# Altium PCB NG6013.PcbDoc
Units mm, origin at the board's own origin, x right, y up, seen from the top; angles counter-clockwise.
Board outline 18 x 24.5 mm, 2 copper layers (Layer 1, Layer 2), stack 1.57 mm thick; 16 components, 15 nets, 73 pads, 34 vias.
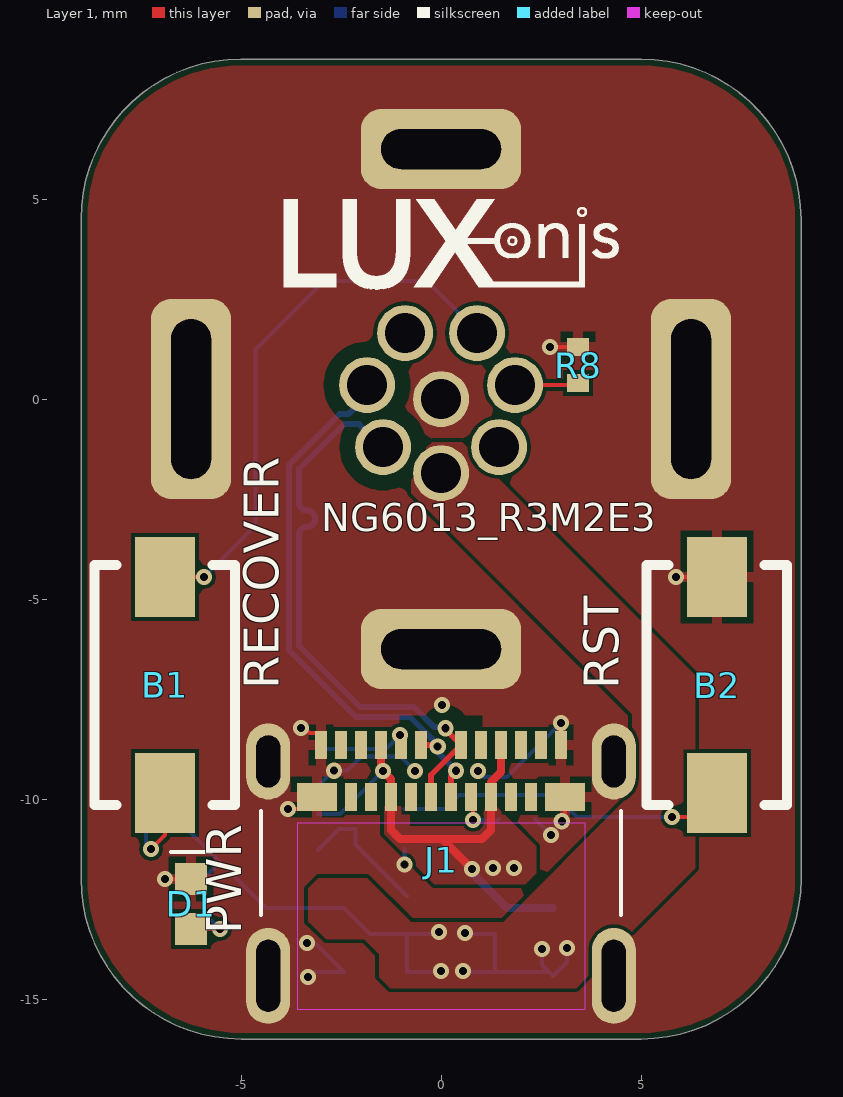
[diagram p0: Layer 1 view]
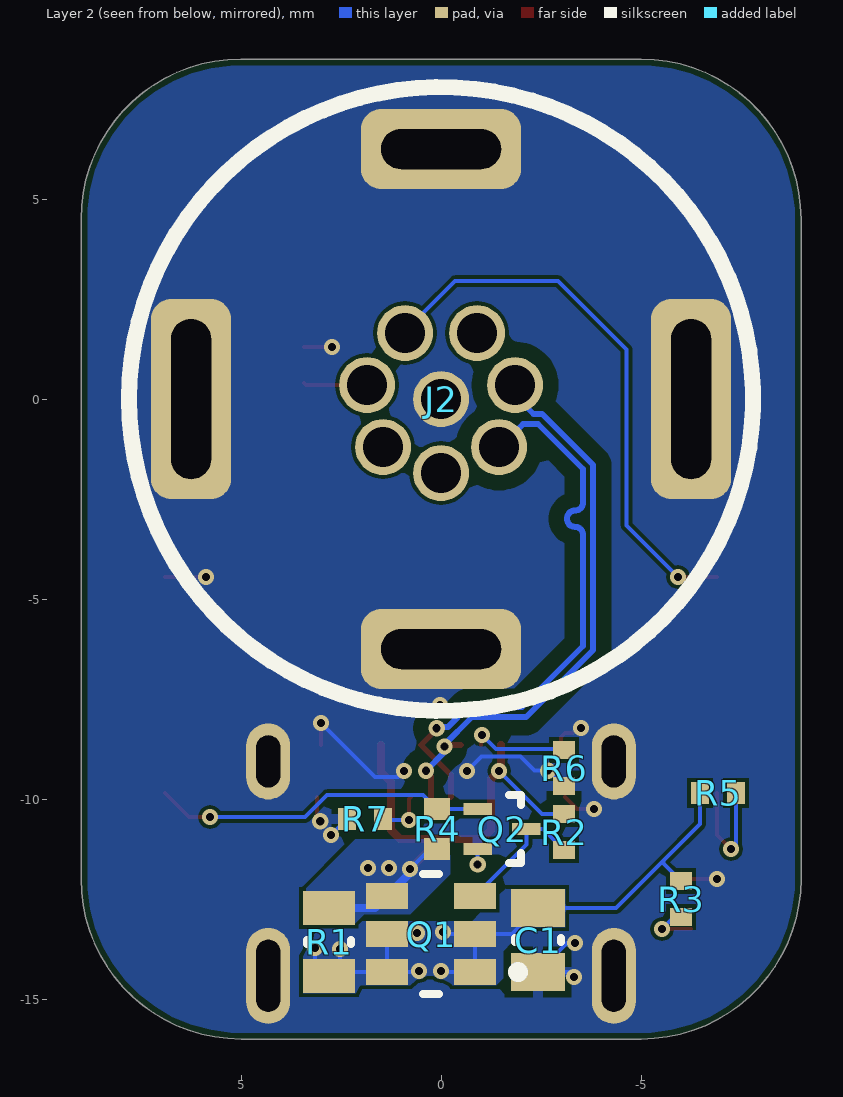
[diagram p1: Layer 2 view, seen from below]
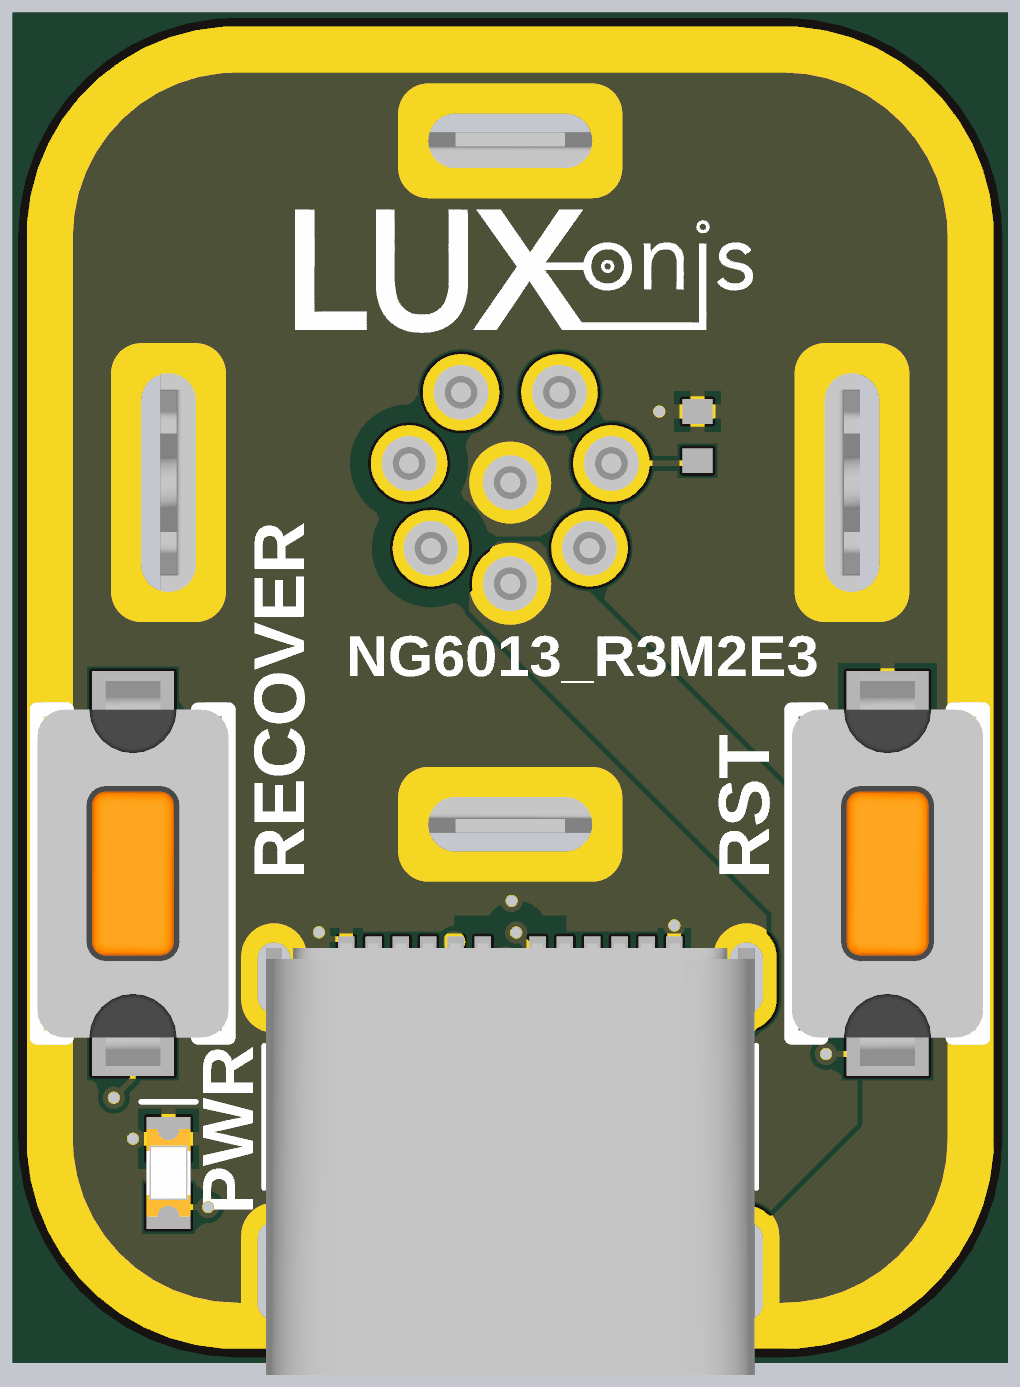
[diagram p2: 3D render of the assembled board from above, using the file's embedded part models]

## Layer stack, top to bottom
Top Solder Mask: solder mask 0.01, Solder Resist, Dk 3.5
Layer 1: signal copper 0.035
Dielectric 2: core 1.5, Core-038, Dk 4.3
Layer 2: signal copper 0.035
Bottom Solder Mask: solder mask 0.01, Solder Resist, Dk 3.5

## Board outline
-9,-12 ccw(c-5,-12) -5,-16 5,-16 ccw(c5,-12) 9,-12 9,4.5 ccw(c5,4.5) 5,8.5 -5,8.5 ccw(c-5,4.5) -9,4.5

## Design rules (kind name [scope] priority, off if disabled: settings)
AcuteAngle [All] p1: minimum=1.50000000000000E+0001 checktracksonly=TRUE
AssemblyTestPointUsage [All] p1: valid=2
BoardOutlineClearance [not InNet('GND')] p1: gap=0.254 ignorepadtopadclearanceinfootprint=FALSE except(0: Text-OutlineEdge Text-CavityEdge Text-CutoutEdge Text-SplitBarrior Text-SplitContinuation)
BoardOutlineClearance BoardOutlineClearance_GND [All] p2: gap=0.15 ignorepadtopadclearanceinfootprint=FALSE
Clearance diff_pair_gnd [InPolygon vs InAnyDifferentialPair] p1: gap=0.381 ignorepadtopadclearanceinfootprint=FALSE
Clearance [All] p2: gap=0.089 ignorepadtopadclearanceinfootprint=FALSE
Clearance Clearance_default [All] p3: gap=0.102 ignorepadtopadclearanceinfootprint=FALSE
ComponentClearance "BGA Decoupling Clearance" [IsComponent AND OnBottomLayer AND WithinRoom('BGA Decoupling') vs IsComponent AND OnBottomLayer AND WithinRoom('BGA Decoupling')] p1: gap=0 collisioncheckmode=3 verticalgap=0 showdistances=FALSE
ComponentClearance [All] p2: gap=0 collisioncheckmode=3 verticalgap=0 showdistances=TRUE
ComponentOrientations [All] p1: allowedrotations=32
DiffPairsRouting USB [InDifferentialPairClass('USB3')] p1: maxlimit=0.1 minlimit=0.1 mostfreqgap=0.1 toplayer_minwidth=0.15 toplayer_maxwidth=0.15 toplayer_prefwidth=0.15 bottomlayer_minwidth=0.15 bottomlayer_maxwidth=0.15 bottomlayer_prefwidth=0.15 impedanceprofiledriven=TRUE impedanceprofileid={297CAB22-67D0-4EEE-AAEA-9CF56FDF7430} impedanceprofilevalue=90.000000 maxuncoupledlength=12.7
FabricationTestPointUsage [All] p1: valid=2 allowmultiple=FALSE
HoleSize [All] p1: absolutevalues=TRUE maxlimit=25.4 minlimit=0.102 maxpercent=80.000 minpercent=20.000
HoleToHoleClearance [All] p1: gap=0.076 allowstackedmicrovias=TRUE
MatchedLengths "Schematic Matched Net Lengths" [InNetClass('USB')] p1: tolerance=25.4 checknetsindiffpair=TRUE checkdiffpairvsdiffpair=FALSE checkxsignals=FALSE checkothers=FALSE usedelayunits=TRUE delaytolerance=1.000000
MatchedLengths DifferentialPairs [All] p2: tolerance=0.127 checknetsindiffpair=TRUE checkdiffpairvsdiffpair=FALSE checkxsignals=FALSE checkothers=FALSE usedelayunits=TRUE delaytolerance=1.000000
MinimumAnnularRing [All] p1: minimumring=0.076
MinimumSolderMaskSliver [All] p1: minsoldermaskwidth=0.01
NetAntennae [All] p1: netantennaetolerance=0.025
PlaneConnect [All] p1: pad.planeconnectstyle=Relief pad.reliefexpansion=0.508 pad.reliefentries=4 pad.reliefconductorwidth=0.254 pad.reliefairgap=0.254 via.planeconnectstyle=Direct via.reliefexpansion=0.508 via.reliefentries=4 via.reliefconductorwidth=0.254 via.reliefairgap=0.254
PolygonConnect Outer_Layer_PWR [InNetClass('Power_trace')] p1: connectstyle=Direct reliefconductorwidth=0.254 reliefentries=4 polygonreliefangle="90 Angle" airgapwidth=0.254
PolygonConnect GenericPoly [All] p2: thpad.connectstyle=Direct thpad.reliefconductorwidth=0.254 thpad.reliefentries=4 thpad.polygonreliefangle="90 Angle" thpad.airgapwidth=0.254 smdpad.connectstyle=Relief smdpad.reliefconductorwidth=0.254 smdpad.reliefentries=4 smdpad.polygonreliefangle="90 Angle" smdpad.airgapwidth=0.154 via.connectstyle=Direct via.reliefconductorwidth=0.254 via.reliefentries=4 via.polygonreliefangle="90 Angle" via.airgapwidth=0.254
RoutingPriority [InNet('No Net')] p1: routingpriority=0
RoutingVias [All] p1: holewidth=0.203 width=0.406 viastyle="Through Hole" minholewidth=0.203 minwidth=0.406 maxholewidth=0.203 maxwidth=0.406
SMDToCorner [All] p1: distance=0
SMDToPlane [All] p1: distance=0
SilkToSilkClearance [All] p1: silktosilkclearance=-0.254
SilkToSolderMaskClearance [IsPad] p1: minsilkscreentomaskgap=-5 clearancetoexposedcopper=TRUE
SolderMaskExpansion SolderMaskExpansion_via [isvia] p1: expansion=0.102 istentingtop=TRUE
SolderMaskExpansion [All] p2: expansion=0.051 istentingtop=FALSE
UnRoutedNet [All] p1: checkbadconnections=TRUE
ViasUnderSMD [All] p1: allowed=TRUE
Width Width_default [Not IsDifferentialPair] p1: maxlimit=1.27 minlimit=0.102 preferedwidth=0.102
17 further rules are at their usual default settings.

## Classes and differential pairs
net class Power_trace: VBUS_USB VBUSOUT
net class USB: USB_D_N USB_D_P
differential pair class USB3: RXB RXC TXB TXC USB_D
differential pair USB_D: +USB_D_P -USB_D_N

## Components (designator, comment, footprint, x,y, rotation, side; value= is the part's Value field where it differs from the comment)
B1 "Off-Mom, 50mA" DTSM-32N-V -6.9,-7.15 r270 top locked
B2 "Off-Mom, 50mA" DTSM-32N-V 6.9,-7.15 r270 top
C1 "47UF 0805" CAPC0805(2012)145_L -2.425,-13.525 r90 bottom
D1 "GREEN 0603" SML_D1xx8W -6.25,-12.625 r270 top
J1 "USB3.1 TYPEC 24P SMD RA" 105450-0101 0,-9.3 r0 top locked
J2 "08-3101-08PB" 1424236 0,0 r180 bottom locked
Q1 "IRLTS2242TRPBF" TSOP-6-MFG 0.25,-13.375 r0 bottom
Q2 "RE1C002UNTCL" RE1C002UNTCL -1.525,-10.75 r270 bottom
R1 "0R 0805" RESC0805(2012)_L 2.8,-13.575 r270 bottom
R2 "100K 0402" RESC0402(1005)_L -3.075,-10.825 r90 bottom
R3 "1K 0402" RESC0402(1005)_L -6,-12.5 r90 bottom
R4 "4.7K 0402" RESC0402(1005)_N 0.1,-10.75 r270 bottom
R5 "10K 0402" RESC0402(1005)_L -6.925,-9.85 r0 bottom
R6 "5.11K 0402" RESC0402(1005)_L -3.075,-9.225 r90 bottom
R7 "5.11K 0402" RESC0402(1005)_L 1.9,-10.5 r180 bottom
R8 "0R 0402" RESC0402(1005)_L 3.425,0.85 r270 top

## Footprints (in the part's own frame and the unit in brackets; to place one, negate y for a bottom-side part, rotate by r counter-clockwise, add the part's x,y. Pads: shape width x height; smd on the part's side, far side on the other; paste and mask are expansions set on the pad)
105450-0101 [mm] "USB3.1 Type-C Molex SMT, RA, TH"
  rect 0.3x0.7 smd mask+0.05: A1(-3,0.65) A2(-2.5,0.65) A3(-2,0.65) A4(-1.5,0.65) A5(-1,0.65) A6(-0.5,0.65) A7(0.5,0.65) A8(1,0.65) A9(1.5,0.65) A10(2,0.65) A11(2.5,0.65) A12(3,0.65) B2(2.25,-0.65) B3(1.75,-0.65) B4(1.25,-0.65) B5(0.75,-0.65) B6(0.25,-0.65) B7(-0.25,-0.65) B8(-0.75,-0.65) B9(-1.25,-0.65) B10(-1.75,-0.65) B11(-2.25,-0.65)
  rect 1x0.7 smd mask+0.05: B1(3.1,-0.65) B12(-3.1,-0.65)
  oval 1.1x1.9 hole 0.6 slot 1.3 at 90 deg mask+0.05: SH1(-4.32,0.24) SH4(4.32,0.24)
  oval 1.1x2.4 hole 0.6 slot 1.8 at 90 deg mask+0.05: SH2(-4.32,-5.12) SH3(4.32,-5.12)
  Layer 1 keep-out region: -3.6,-5.95 3.6,-5.95 3.6,-1.3 -3.6,-1.3
  silkscreen extent -4.5,-3.6 4.5,-1, body extent -4.47,-7.02 4.47,0.88, height 3.2
1424236 [mm]
  round 1.4 hole 1 paste-10 mask+0.05: 1(-0.9,1.65) 2(0.9,1.65) 3(1.85,0.35) 4(1.45,-1.2) 5(0,-1.85) 6(-1.45,-1.2) 7(-1.85,0.35) 8(0,0)
  rrect50% 4x2 hole 1 slot 3 at 0 deg paste-10 mask+0.05: 9(0,-6.25) 11(0,6.25)
  rrect50% 2x5 hole 1 slot 4 at 90 deg paste-10 mask+0.05: 10(6.25,0) 12(-6.25,0)
  silkscreen extent -7.8,-7.8 7.8,7.8, body extent -6.4,-6.4 6.4,6.4, height 17.2
CAPC0805(2012)145_L [mm] "Chip Capacitor, Body 2.0x1.2mm, Height 1.45mm, IPC High Density"
  rect 0.95x1.35 smd: 1(-0.8,0) 2(0.8,0)
  silkscreen extent -0.05,-0.58 0.05,0.58, body extent -1.1,-0.73 1.1,0.72, height 1.45
DTSM-32N-V [mm] "tactile button 160gf"
  rect 2x1.5 smd: 1(-2.7,0) 2(2.7,0)
  silkscreen extent -3.01,-1.76 3,1.75, body extent -3.65,-1.75 3.65,1.75, height 5
RE1C002UNTCL [mm] "ROHM SOT-416FL"
  rect 0.3x0.71 smd: 1(-0.5,-0.61) 2(0.5,-0.61) 3(0,0.61)
  silkscreen extent -0.85,0.17 0.85,0.48, body extent -0.8,-0.8 0.8,0.8, height 0.75
RESC0402(1005)_L [mm] "Chip Resistor, Body 1.0x0.5mm, IPC High Density"
  rect 0.45x0.55 smd: 1(-0.45,0) 2(0.45,0)
  body extent -0.52,-0.27 0.53,0.28, height 0.4
RESC0402(1005)_N [mm] "Chip Resistor, Body 1.0x0.5mm, IPC Medium Density"
  rect 0.55x0.65 smd: 1(-0.5,0) 2(0.5,0)
  body extent -0.52,-0.27 0.53,0.28, height 0.4
RESC0805(2012)_L [mm] "Chip Resistor, Body 2.0x1.3mm, IPC High Density"
  rect 0.85x1.3 smd: 1(-0.85,0) 2(0.85,0)
  silkscreen extent -0.05,-0.55 0.05,0.55, body extent -1.1,-0.67 1.1,0.68, height 0.7
SML_D1xx8W [mm] "Rohm LED SML_D1 series - Chip Diode, 2-Leads, Body 1.60x0.80mm, IPC High Density"
  rect 0.8x0.8 smd: 1(-0.625,0) 2(0.625,0)
  silkscreen extent -1.3,-0.5 -1.3,0.5, body extent -0.8,-0.4 0.8,0.4, height 0.6
TSOP-6-MFG [mm]
  rect 1.06x0.65 smd: 1(-1.1,0.95) 2(-1.1,0) 3(-1.1,-0.95) 4(1.1,-0.95) 5(1.1,0) 6(1.1,0.95)
  silkscreen extent -2.3,-1.5 0.2,1.5, body extent -1.4,-1.45 1.4,1.45, height 1.45

## Part data
B1 B2: library part DTSM-32N-V, "SWITCH TACTILE SMT 3.5mm * 6mm , brown 160gf", Manufacturer 1=Diptronics, Manufacturer Part Number 1=DTSM-32N-V-T/R, Max Operating Temperature=80°C, Min Operating Temperature=-30°C, Supplier Part Number 1=113-DTSM32NVTR, ComponentLink1Description=https://datasheet.ciiva.com/29188/708548-da-01-en-tastschalter-smd-dtsm-32n-v-tr-1600st-29188823.pdf?src-supplier=Conrad, ComponentLink1URL=https://datasheet.ciiva.com/29188/708548-da-01-en-tastschalter-smd-dtsm-32n-v-tr-1600st-29188823.pdf?src-supplier=Conrad, Height=5mm, Length=6mm, Pricing 1="1=0.38000, 10=0.38000, 50=0.31000, 100=0.28200, 500=0.25600, 1000=0.23600, 1600=0.20900, 4800=0.18800, 9600=0.17300, 10000=0.17300, 24000=0.16100 (USD)", RoHS=Yes, Stock 1=3199, Supplier 1=Mouser, Width=3.5mm
C1: library part GRM21BR60J476ME15L, "CAP CER 47UF 6.3V X5R 0805", Capacitance=47uF, Case Code (Imperial)=0805, Case Code (Metric)=2012, Dielectric=X5R, Manufacturer 1=Murata, Max Operating Temperature=85°C, Min Operating Temperature=-55°C, Package Quantity=3000, Supplier Part Number 1=490-9960-1-ND, Tolerance=20%, Voltage=6.3V, Case/Package=0805, ComponentLink1Description=https://datasheet.ciiva.com/46444/1754700-46444997.pdf?src-supplier=Element14, ComponentLink1URL=https://datasheet.ciiva.com/46444/1754700-46444997.pdf?src-supplier=Element14, Depth=1.25mm, Height=1.25mm, Lead Free="Lead Free", Length=2mm, Manufacturer Part Number 1=GRM21BR60J476ME15L, Mount="Surface Mount", Packaging="Tape and Reel", Pricing 1="1=0.48000, 10=0.33900, 100=0.22360, 500=0.16560, 1000=0.14076 (USD)", REACH SVHC="No SVHC", RoHS=Yes, Stock 1=16165, Supplier 1=Digi-Key, Supplier 2=Newark, Supplier 3=Mouser, Supplier Part Number 2=40X5890, Supplier Part Number 3=81-GRM21BR60J476ME5L, Termination=SMD/SMT, Thickness=0.057inch, Voltage Rating=6.3V, Voltage Rating (DC)=6.3V, Weight=0.000335oz, Width=0.049inch
D1: library part SML-D12M8WT86, "LED GREEN DIFFUSED 0603 SMD Green 572nm LED Indication - Discrete 2.2V 0603 (1608 Metric)", Case Code (Imperial)=0603, Case Code (Metric)=1608, Color=Green,Yellow, Forward Current=20mA, Forward Voltage=2.2V, Illumination Color=Green, Lens Color=White,Diffused, Lens Colour=White,Clear,Diffused, Manufacturer=Rohm, Max Operating Temperature=85°C, Min Operating Temperature=-40°C, Package Quantity=1, Supplier Part Number 1=511-1578-1-ND, Case/Package=0603, Colour=Green,Yellow, ComponentLink1Description=https://datasheet.ciiva.com/11774/0900766b80df3ada-11774260.pdf, ComponentLink1URL=https://datasheet.ciiva.com/11774/0900766b80df3ada-11774260.pdf, ComponentLink2Description=https://datasheet.ciiva.com/3161/sml-d1-3161419.pdf, ComponentLink2URL=https://datasheet.ciiva.com/3161/sml-d1-3161419.pdf, ComponentLink3Description=https://datasheet.ciiva.com/2110/sml-d1-2110396.pdf, ComponentLink3URL=https://datasheet.ciiva.com/2110/sml-d1-2110396.pdf, ComponentLink4Description=https://datasheet.ciiva.com/2110/sml-d1-2110397.pdf, ComponentLink4URL=https://datasheet.ciiva.com/2110/sml-d1-2110397.pdf, ComponentLink5Description=https://datasheet.ciiva.com/2110/sml-d1-2110398.pdf, ComponentLink5URL=https://datasheet.ciiva.com/2110/sml-d1-2110398.pdf, ComponentLink6Description=https://datasheet.ciiva.com/11774/0900766b80df3ada-11774260.pdf?src-supplier=RSComponents, ComponentLink6URL=https://datasheet.ciiva.com/11774/0900766b80df3ada-11774260.pdf?src-supplier=RSComponents, ComponentLink7Description=https://datasheet.ciiva.com/3161/sml-d1-3161419.pdf?src-supplier=Avnet, ComponentLink7URL=https://datasheet.ciiva.com/3161/sml-d1-3161419.pdf?src-supplier=Avnet, ComponentLink8Description=https://datasheet.ciiva.com/2110/sml-d1-2110396.pdf?src-supplier=Digi-Key, ComponentLink8URL=https://datasheet.ciiva.com/2110/sml-d1-2110396.pdf?src-supplier=Digi-Key, ComponentLink9Description=https://datasheet.ciiva.com/2110/sml-d1-2110397.pdf?src-supplier=Digi-Key, ComponentLink9URL=https://datasheet.ciiva.com/2110/sml-d1-2110397.pdf?src-supplier=Digi-Key, ComponentLink10Description=https://datasheet.ciiva.com/2110/sml-d1-2110398.pdf?src-supplier=Digi-Key, ComponentLink10URL=https://datasheet.ciiva.com/2110/sml-d1-2110398.pdf?src-supplier=Digi-Key, Dominant Wavelength=572nm, Height=0.65mm, Illumination Colour=Green, Lead Free="Lead Free", Length=1.6mm, Lens Style=Diffused,Colorless,Rectangular, Lens Transparency=Diffused, Luminous Intensity=25mcd, Manufacturer 1=Rohm, Manufacturer Part Number=SML-D12M8WT86, Manufacturer Part Number 1=SML-D12M8WT86, Mount="Surface Mount", Number of LEDs=1, Number of Pins=2, Packaging="Tape and Reel", Pricing 1="1=0.33000, 10=0.23900, 100=0.11340, 500=0.07560, 1000=0.05922 (USD)", Radiation Hardening=No, REACH SVHC=Unknown, RoHS=Yes, Stock 1=112971, Supplier 1=Digi-Key, Test Current=20mA, Viewing Angle=160°, Wavelength=572nm, Width=0.8mm
J1: library part 105450-0101, "CONN RCP USB3.1 TYPEC 24P SMD RA", Case/Package=0101, Current Rating=5A, Flammability Rating="UL94 V-0", Insulation Color=Black, Manufacturer 1=Molex, Max Operating Temperature=85°C, Min Operating Temperature=-30°C, Supplier Part Number 1=WM12856CT-ND, ComponentLink1Description=http://www.farnell.com/datasheets/2673427.pdf?src-supplier=Farnell, ComponentLink1URL=http://www.farnell.com/datasheets/2673427.pdf?src-supplier=Farnell, ComponentLink2Description=http://www.farnell.com/datasheets/2801634.pdf?src-supplier=Farnell, ComponentLink2URL=http://www.farnell.com/datasheets/2801634.pdf?src-supplier=Farnell, ComponentLink3Description=http://www.farnell.com/datasheets/2672741.pdf?src-supplier=Newark, ComponentLink3URL=http://www.farnell.com/datasheets/2672741.pdf?src-supplier=Newark, ComponentLink4Description=https://www.molex.com/pdm_docs/sd/1054500101_sd.pdf?src-supplier=Digi-Key, ComponentLink4URL=https://www.molex.com/pdm_docs/sd/1054500101_sd.pdf?src-supplier=Digi-Key, ComponentLink5Description=https://www.molex.com/pdm_docs/ps/PS-105448-001.pdf?src-supplier=Digi-Key, ComponentLink5URL=https://www.molex.com/pdm_docs/ps/PS-105448-001.pdf?src-supplier=Digi-Key, ComponentLink6Description=http://www.farnell.com/datasheets/2015275.pdf?src-supplier=Element14, ComponentLink6URL=http://www.farnell.com/datasheets/2015275.pdf?src-supplier=Element14, ComponentLink7Description=http://www.literature.molex.com/SQLImages/kelmscott/Molex/PDF_Images/987651-4081.PDF?src-supplier=Avnet, ComponentLink7URL=http://www.literature.molex.com/SQLImages/kelmscott/Molex/PDF_Images/987651-4081.PDF?src-supplier=Avnet, ComponentLink8Description=http://www.literature.molex.com/SQLImages/kelmscott/Molex/PDF_Images/987651-4081.PDF?src-supplier=Avnet+Asia, ComponentLink8URL=http://www.literature.molex.com/SQLImages/kelmscott/Molex/PDF_Images/987651-4081.PDF?src-supplier=Avnet+Asia, Connector Type=USB, Contact Material="Copper Alloy", Contact Plating=Gold, Features=Shielded, Gender=Receptacle, Housing Material=Thermoplastic, Length=8.94mm, Manufacturer Part Number 1=105450-0101, Mating Cycles=10000, Mount="Surface Mount,Through Hole,Horizontal", Number of Contacts=24, Number of Pins=24, Number of Ports=1, Number of Terminals=24, Orientation="Right Angle", Packaging="Tape and Reel", Pitch=0.5mm, Pricing 1="1=2.15000, 10=1.94900, 25=1.82960, 50=1.75000, 100=1.67050, 250=1.51140, 500=1.39208 (USD)", REACH SVHC=Unknown, RoHS=Yes, Shielding=Shielded, Stock 1=13882, Supplier 1=Digi-Key, Termination=Solder, USB Standard="USB 3.1"
J2: library part 1424236, "Circular Connector", Manufacturer 1="King Top", Supplier Part Number 1=277-8169-ND, Category="Circular Connectors", ComponentLink1Description=https://datasheet.ciiva.com:443/pdfs/VipMasterIC/IC/PCON/PCONS25324/PCONS30824-1.pdf?src-supplier=IHS+Markit, ComponentLink1URL=https://datasheet.ciiva.com:443/pdfs/VipMasterIC/IC/PCON/PCONS25324/PCONS30824-1.pdf?src-supplier=IHS+Markit, ComponentLink2Description=https://datasheet.ciiva.com/7315/1424236-7315412.pdf?src-supplier=Digi-Key, ComponentLink2URL=https://datasheet.ciiva.com/7315/1424236-7315412.pdf?src-supplier=Digi-Key, ComponentLink3Description=https://datasheet.ciiva.com/15197/getdatasheetpartid-694612-15197214.pdf?src-supplier=Verical, ComponentLink3URL=https://datasheet.ciiva.com/15197/getdatasheetpartid-694612-15197214.pdf?src-supplier=Verical, ComponentLink4Description=https://datasheet.ciiva.com/29258/715201-da-01-en-sens-akt-einbausteck-8pol-1424236-20st-29258298.pdf?src-supplier=Conrad, ComponentLink4URL=https://datasheet.ciiva.com/29258/715201-da-01-en-sens-akt-einbausteck-8pol-1424236-20st-29258298.pdf?src-supplier=Conrad, Connector Type=Circular, Manufacturer Part Number 1=08-3101-08PB, Manufacturer Series=1424236, Pricing 1="1=28,78000, 10=26,47800, 50=24,46320, 100=23,36940 (USD)", REACH SVHC="No SVHC", RoHS=Yes, RoHS Compliant=Yes, Supplier 1=Digi-Key
Q1: "MOSFET P-CH 20V 6.9A 6TSOP", Case/Package=TSOP, Continuous Drain Current (ID)=6.9A, Drain to Source Voltage (Vdss)=-20V, Gate to Source Voltage (Vgs)=12V, Input Capacitance=905pF, Manufacturer 1=Infineon, Max Operating Temperature=150°C, Max Power Dissipation=2W, Min Operating Temperature=-55°C, Threshold Voltage=-400mV, Contact Plating=Tin, Halogen Free="Halogen Free", Lead Free="Lead Free", Manufacturer Part Number 1=IRLTS2242TRPBF, Max Dual Supply Voltage=-20V, Mount="Surface Mount", Number of Pins=6, Packaging="Tape and Reel", Rds On Max=32mR, REACH SVHC="No SVHC", Rise Time=18ns, RoHS Compliant=Yes
Q2: "VISHAY - SI1062X-T1-GE3 - MOSFET Transistor, N Channel, 530 mA, 20 V, 0.35 ohm, 4.5 V, 1 V", Case/Package=SOT-89, Continuous Drain Current (ID)=200mA, Drain to Source Breakdown Voltage=20V, Drain to Source Resistance=350mR, Drain-source On Resistance-Max=420mR, Gate to Source Voltage (Vgs)=8V, Input Capacitance=25pF, Manufacturer 1=Rohm, Manufacturer 2="Vishay Siliconix", Manufacturer Part Number 2=SI1062X-T1-GE3, Max Operating Temperature=150°C, Max Power Dissipation=150mW, Min Operating Temperature=-55°C, Package Quantity=3000, Power Dissipation=220mW, Supplier Part Number 1=RE1C002UNTCLCT-ND, Threshold Voltage=1V, Category=MOSFETs, ComponentLink1Description=http://www.mouser.com/ds/2/348/re1c002untcl-e-1018231.pdf?src-supplier=Mouser, ComponentLink1URL=http://www.mouser.com/ds/2/348/re1c002untcl-e-1018231.pdf?src-supplier=Mouser, ComponentLink2Description=http://rohmfs.rohm.com/en/techdata_basic/transistor/taping/EMT3_TL_taping.pdf?src-supplier=Digi-Key, ComponentLink2URL=http://rohmfs.rohm.com/en/techdata_basic/transistor/taping/EMT3_TL_taping.pdf?src-supplier=Digi-Key, ComponentLink3Description=http://rohmfs.rohm.com/en/products/databook/datasheet/discrete/transistor/mosfet/re1c002un.pdf?src-supplier=Avnet, ComponentLink3URL=http://rohmfs.rohm.com/en/products/databook/datasheet/discrete/transistor/mosfet/re1c002un.pdf?src-supplier=Avnet, ComponentLink4Description=https://www.rohm.com/datasheet/RE1C002UN/re1c002untcl-e?src-supplier=Digi-Key, ComponentLink4URL=https://www.rohm.com/datasheet/RE1C002UN/re1c002untcl-e?src-supplier=Digi-Key, ComponentLink5Description=http://www.farnell.com/datasheets/2704376.pdf?src-supplier=Newark, ComponentLink5URL=http://www.farnell.com/datasheets/2704376.pdf?src-supplier=Newark, ComponentLink6Description=http://www.farnell.com/datasheets/2704376.pdf?src-supplier=Farnell, ComponentLink6URL=http://www.farnell.com/datasheets/2704376.pdf?src-supplier=Farnell, ComponentLink7Description=http://www.farnell.com/datasheets/2704376.pdf?src-supplier=Element14, ComponentLink7URL=http://www.farnell.com/datasheets/2704376.pdf?src-supplier=Element14, ComponentLink8Description=https://datasheet.ciiva.com/6376/si1062x-6376310.pdf?src-supplier=Digi-Key, ComponentLink8URL=https://datasheet.ciiva.com/6376/si1062x-6376310.pdf?src-supplier=Digi-Key, ComponentLink9Description=https://datasheet.ciiva.com/24011/si1062x-256537-24011195.pdf?src-supplier=Mouser, ComponentLink9URL=https://datasheet.ciiva.com/24011/si1062x-256537-24011195.pdf?src-supplier=Mouser, ComponentLink10Description=https://datasheet.ciiva.com/6376/si1062x-6376251.pdf?src-supplier=Digi-Key, ComponentLink10URL=https://datasheet.ciiva.com/6376/si1062x-6376251.pdf?src-supplier=Digi-Key, Drain to Source Voltage (Vdss)=20V, Element Configuration=Single, Fall Time=11ns, Lead Free="Lead Free", Manufacturer Part Number 1=RE1C002UNTCL, Mount="Surface Mount", Number of Channels=1, Number of Elements=1, Number of Pins=3, On-State Resistance=420mR, Packaging="Tape and Reel", Polarity=N-CHANNEL, Pricing 1="1=0.20000, 10=0.18200, 100=0.09930, 500=0.06112, 1000=0.04167 (USD)", Pricing 2="1=0,47000, 10=0,33100, 25=0,30800, 100=0,16720, 500=0,13640, 1000=0,10120 (USD)", Rds On Max=1.2R, REACH SVHC="No SVHC", Rise Time=14ns, RoHS=Yes, RoHS Compliant=Yes, Series=TrenchFET®, Stock 1=868886, Stock 2=28076, Supplier 1=Digi-Key, Supplier 2=Digi-Key, Supplier 3=Digi-Key, Supplier Part Number 2=SI1062X-T1-GE3CT-ND, Supplier Part Number 3=SI1062X-T1-GE3TR-ND, Turn-Off Delay Time=16ns, Turn-On Delay Time=2ns, Weight=0.001058oz
R1: library part CRCW08050000Z0EA, "RES SMD 0.0R OHM 1% 1/8W 0805", Manufacturer 1=Vishay, Max Operating Temperature=155°C, Min Operating Temperature=-55°C, Package Height=0.45mm, Package Length=2mm, Package Shape=Rectangular, Package Style=SMTMeter, Package Width=1.25mm, Rated Power Dissipation (P)=125mW, Rated Temperature=70°C, Resistance=0R, Resistor Type="FIXED RESISTOR", Supplier Part Number 1=6790800, Category="Chip SMD Resistors", ComponentLink1Description=https://datasheet.ciiva.com:443/pdfs/VipMasterIC/IC/VISH/VISH-S-A0007266705/VISH-S-A0007266705-1.pdf?src-supplier=IHS+Markit, ComponentLink1URL=https://datasheet.ciiva.com:443/pdfs/VipMasterIC/IC/VISH/VISH-S-A0007266705/VISH-S-A0007266705-1.pdf?src-supplier=IHS+Markit, ComponentLink2Description=https://datasheet.ciiva.com/11811/0900766b80d98b26-11811304.pdf?src-supplier=RSComponents, ComponentLink2URL=https://datasheet.ciiva.com/11811/0900766b80d98b26-11811304.pdf?src-supplier=RSComponents, ComponentLink3Description=https://datasheet.ciiva.com/16883/dcrcwe3-16883622.pdf?src-supplier=Avnet+Europe, ComponentLink3URL=https://datasheet.ciiva.com/16883/dcrcwe3-16883622.pdf?src-supplier=Avnet+Europe, ComponentLink4Description=https://datasheet.ciiva.com/26314/fld-crcw-e3-data-en-26314630.pdf?src-supplier=Distrelec, ComponentLink4URL=https://datasheet.ciiva.com/26314/fld-crcw-e3-data-en-26314630.pdf?src-supplier=Distrelec, ComponentLink5Description=https://datasheet.ciiva.com/5543/dcrcwe3-109170-5543096.pdf?src-supplier=Mouser, ComponentLink5URL=https://datasheet.ciiva.com/5543/dcrcwe3-109170-5543096.pdf?src-supplier=Mouser, ComponentLink6Description=https://datasheet.ciiva.com/16389/dcrcwe3-16389338.pdf?src-supplier=Future+Electronics, ComponentLink6URL=https://datasheet.ciiva.com/16389/dcrcwe3-16389338.pdf?src-supplier=Future+Electronics, ComponentLink7Description=https://datasheet.ciiva.com/16719/70201119-16719706.pdf?src-supplier=Allied+Electronics, ComponentLink7URL=https://datasheet.ciiva.com/16719/70201119-16719706.pdf?src-supplier=Allied+Electronics, ComponentLink8Description=https://datasheet.ciiva.com/2463/dcrcwe3-2463037.pdf?src-supplier=Digi-Key, ComponentLink8URL=https://datasheet.ciiva.com/2463/dcrcwe3-2463037.pdf?src-supplier=Digi-Key, ComponentLink9Description=https://datasheet.ciiva.com/7841/1697337-7841629.pdf?src-supplier=Element14, ComponentLink9URL=https://datasheet.ciiva.com/7841/1697337-7841629.pdf?src-supplier=Element14, ComponentLink10Description=https://datasheet.ciiva.com/2463/dcrcwe3-2463038.pdf?src-supplier=Digi-Key, ComponentLink10URL=https://datasheet.ciiva.com/2463/dcrcwe3-2463038.pdf?src-supplier=Digi-Key, ComponentLink11Description=https://datasheet.ciiva.com/2463/dcrcwe3-2463039.pdf?src-supplier=Digi-Key, ComponentLink11URL=https://datasheet.ciiva.com/2463/dcrcwe3-2463039.pdf?src-supplier=Digi-Key, ComponentLink12Description=https://datasheet.ciiva.com/7841/1720486-7841839.pdf?src-supplier=Element14, ComponentLink12URL=https://datasheet.ciiva.com/7841/1720486-7841839.pdf?src-supplier=Element14, Construction=Chip, JESD-609 Code=e3, Manufacturer Part Number 1=CRCW08050000Z0EA, Mount="Surface Mount", Number of Pins=2, Packaging="Tape and Reel", Pricing 1="50=0,02700, 250=0,02400, 500=0,02000, 750=0,01500, 1000=0,01300, 50=0,01900, 250=0,01700, 500=0,01400, 750=0,01100, 1000=0,00900 (USD)", REACH SVHC=Yes, Reference Standard=AEC-Q200, RoHS=Yes, RoHS Compliant=Yes, Size Code=0805, Stock 1=850, Supplier 1=RSComponents, Technology="METAL GLAZE/THICK FILM", Terminal Finish=Nickel, Termination=Wraparound
R2: library part RC0402FR-07100KL, "RES SMD 100K OHM 1% 1/16W 0402", Case Code (Imperial)=0402, Case Code (Metric)=1005, Manufacturer 1=Yageo, Max Operating Temperature=155°C, Max Power Dissipation=63mW, Min Operating Temperature=-55°C, Package Quantity=1, Resistance=100kR, Supplier Part Number 1=311-100KLRCT-ND, Temperature Coefficient=100ppm/°C, Tolerance=1%, Voltage Rating=50V, Case/Package=0402, ComponentLink1Description=https://datasheet.ciiva.com/11819/0900766b80c66297-11819452.pdf?src-supplier=RSComponents, ComponentLink1URL=https://datasheet.ciiva.com/11819/0900766b80c66297-11819452.pdf?src-supplier=RSComponents, ComponentLink2Description=https://datasheet.ciiva.com/2453/pyu-r-int-thick-7-2453361.pdf?src-supplier=Digi-Key, ComponentLink2URL=https://datasheet.ciiva.com/2453/pyu-r-int-thick-7-2453361.pdf?src-supplier=Digi-Key, ComponentLink3Description=https://datasheet.ciiva.com/2453/pyu-r-int-thick-7-2453362.pdf?src-supplier=Digi-Key, ComponentLink3URL=https://datasheet.ciiva.com/2453/pyu-r-int-thick-7-2453362.pdf?src-supplier=Digi-Key, ComponentLink4Description=https://datasheet.ciiva.com/2453/pyu-r-int-thick-7-2453363.pdf?src-supplier=Digi-Key, ComponentLink4URL=https://datasheet.ciiva.com/2453/pyu-r-int-thick-7-2453363.pdf?src-supplier=Digi-Key, ComponentLink5Description=https://datasheet.ciiva.com/22747/1018594-22747509.pdf?src-supplier=Element14, ComponentLink5URL=https://datasheet.ciiva.com/22747/1018594-22747509.pdf?src-supplier=Element14, ComponentLink6Description=https://datasheet.ciiva.com/15189/getdatasheetpartid-323696-15189334.pdf?src-supplier=Verical, ComponentLink6URL=https://datasheet.ciiva.com/15189/getdatasheetpartid-323696-15189334.pdf?src-supplier=Verical, ComponentLink7Description=https://datasheet.ciiva.com/12667/pyu-rc0402-51-rohs-l-6-r-12667930.pdf?src-supplier=Mouser, ComponentLink7URL=https://datasheet.ciiva.com/12667/pyu-rc0402-51-rohs-l-6-r-12667930.pdf?src-supplier=Mouser, Composition="Thick Film", Depth=0.5mm, Features="Moisture Resistant", Height=0.016inch, Lead Free="Lead Free", Length=0.039inch, Manufacturer Part Number 1=RC0402FR-07100KL, Military Standard=Not, Number of Terminations=2, Packaging="Tape and Reel", Power Rating=63mW, Pricing 1="1=0.10000, 10=0.01500, 100=0.00600, 1000=0.00270, 2500=0.00235, 5000=0.00194 (USD)", REACH SVHC="No SVHC", RoHS=Yes, Stock 1=50867324, Supplier 1=Digi-Key, Supplier 2=Newark, Supplier 3=Mouser, Supplier Part Number 2=67R9887, Supplier Part Number 3=603-RC0402FR-07100KL, Termination=SMD/SMT, Width=0.02inch, Working Voltage=50V
R3: library part RC0402FR-071KL, "RES SMD 1K OHM 1% 1/16W 0402 1 kOhms ±1% 0.063W, 1/16W Chip Resistor 0402 (1005 Metric) Moisture Resistant Thick Film", Case Code (Imperial)=0402, Case Code (Metric)=1005, Manufacturer 1=Yageo, Max Operating Temperature=155°C, Min Operating Temperature=-55°C, Power Rating=62.5mW, Resistance=1kR, Supplier Part Number 1=311-1.00KLRCT-ND, Temperature Coefficient=100ppm/°C, Tolerance=1%, Voltage Rating=50V, Case/Package=0402, ComponentLink1Description=https://datasheet.ciiva.com/11819/0900766b80c66297-11819477.pdf?src-supplier=RSComponents, ComponentLink1URL=https://datasheet.ciiva.com/11819/0900766b80c66297-11819477.pdf?src-supplier=RSComponents, ComponentLink2Description=https://datasheet.ciiva.com/12666/pyu-rc0402-51-rohs-l-6-r-12666741.pdf?src-supplier=Mouser, ComponentLink2URL=https://datasheet.ciiva.com/12666/pyu-rc0402-51-rohs-l-6-r-12666741.pdf?src-supplier=Mouser, ComponentLink3Description=https://datasheet.ciiva.com/17063/pyu-rc0402-51-rohs-l-6-r-17063193.pdf?src-supplier=Future+Electronics, ComponentLink3URL=https://datasheet.ciiva.com/17063/pyu-rc0402-51-rohs-l-6-r-17063193.pdf?src-supplier=Future+Electronics, ComponentLink4Description=https://datasheet.ciiva.com/22747/1018594-22747513.pdf?src-supplier=Element14, ComponentLink4URL=https://datasheet.ciiva.com/22747/1018594-22747513.pdf?src-supplier=Element14, ComponentLink5Description=https://datasheet.ciiva.com/7849/1018594-7849869.pdf?src-supplier=Element14, ComponentLink5URL=https://datasheet.ciiva.com/7849/1018594-7849869.pdf?src-supplier=Element14, ComponentLink6Description=https://datasheet.ciiva.com/7983/1018594-7983502.pdf?src-supplier=Element14, ComponentLink6URL=https://datasheet.ciiva.com/7983/1018594-7983502.pdf?src-supplier=Element14, ComponentLink7Description=https://datasheet.ciiva.com/7849/1018594-7849871.pdf?src-supplier=Element14, ComponentLink7URL=https://datasheet.ciiva.com/7849/1018594-7849871.pdf?src-supplier=Element14, Composition="Thick Film", Depth=0.5mm, Height=0.32mm, Lead Free="Lead Free", Length=1mm, Manufacturer Part Number 1=RC0402FR-071KL, Military Standard=Not, Number of Pins=2, Packaging="Tape and Reel", Pricing 1="1=0.10000, 10=0.01600, 100=0.00670, 1000=0.00301, 2500=0.00261, 5000=0.00215 (USD)", REACH SVHC=Unknown, RoHS=Yes, Stock 1=60695854, Supplier 1=Digi-Key, Termination=SMD/SMT, Voltage Rating (DC)=50V, Width=0.5mm
R4: library part RC0402FR-074K7L, "RES SMD 4.7K OHM 1% 1/16W 0402", Case Code (Imperial)=0402, Case Code (Metric)=1005, Manufacturer 1=Yageo, Max Operating Temperature=155°C, Min Operating Temperature=-55°C, Power Rating=62.5mW, Resistance=4.7kR, Supplier Part Number 1=311-4.7KLRCT-ND, Temperature Coefficient=100ppm/°C, Tolerance=1%, Voltage Rating=50V, Case/Package=0402, Category="Chip SMD Resistors", ComponentLink1Description=https://datasheet.ciiva.com/7850/1018594-7850022.pdf?src-supplier=Element14, ComponentLink1URL=https://datasheet.ciiva.com/7850/1018594-7850022.pdf?src-supplier=Element14, ComponentLink2Description=https://datasheet.ciiva.com/7850/1018594-7850023.pdf?src-supplier=Element14, ComponentLink2URL=https://datasheet.ciiva.com/7850/1018594-7850023.pdf?src-supplier=Element14, ComponentLink3Description=https://datasheet.ciiva.com/15215/getdatasheetpartid-328119-15215035.pdf?src-supplier=Verical, ComponentLink3URL=https://datasheet.ciiva.com/15215/getdatasheetpartid-328119-15215035.pdf?src-supplier=Verical, ComponentLink4Description=https://datasheet.ciiva.com/22661/1686128-22661342.pdf?src-supplier=Element14, ComponentLink4URL=https://datasheet.ciiva.com/22661/1686128-22661342.pdf?src-supplier=Element14, Composition="Thick Film", Depth=0.5mm, Height=0.32mm, Lead Free="Lead Free", Length=1mm, Manufacturer Part Number 1=RC0402FR-074K7L, Military Standard=Not, Number of Pins=2, Packaging="Tape and Reel", Pricing 1="1=0.10000, 10=0.01600, 100=0.00640, 1000=0.00289, 2500=0.00251, 5000=0.00207 (USD)", REACH SVHC="No SVHC", RoHS=Yes, Stock 1=158763, Supplier 1=Digi-Key, Supplier 2=Digi-Key, Supplier 3=Newark, Supplier 4=Farnell, Supplier Part Number 2=311-4.7KLRTR-ND, Supplier Part Number 3=75X0133, Supplier Part Number 4=2421897, Termination=SMD/SMT, Voltage Rating (DC)=50V, Width=0.5mm
R5: library part RC0402FR-1310KL, "RES SMD 10K OHM 1% 0402 1/16W Chip Resistor, 0402 [1005 Metric], 10 kohm, RC Series, 50 V, Thick Film, 62.5 mW", Case Code (Imperial)=0402, Case Code (Metric)=1005, Manufacturer 1=Yageo, Max Operating Temperature=155°C, Min Operating Temperature=-55°C, Power Rating=62.5mW, Resistance=10kR, Supplier Part Number 1=67R9960, Temperature Coefficient=100ppm/°C, Tolerance=1%, Voltage Rating=50V, Case/Package=0402, ComponentLink1Description=https://datasheet.ciiva.com/16940/pyu-rc0402-51-rohs-l-6-16940293.pdf?src-supplier=Avnet+Europe, ComponentLink1URL=https://datasheet.ciiva.com/16940/pyu-rc0402-51-rohs-l-6-16940293.pdf?src-supplier=Avnet+Europe, ComponentLink2Description=https://datasheet.ciiva.com/28386/pyu-rc0402-51-rohs-l-6-28386855.pdf?src-supplier=Avnet+Europe, ComponentLink2URL=https://datasheet.ciiva.com/28386/pyu-rc0402-51-rohs-l-6-28386855.pdf?src-supplier=Avnet+Europe, ComponentLink3Description=https://datasheet.ciiva.com/16740/pyu-rc0402-51-rohs-l-6-r-16740602.pdf?src-supplier=Future+Electronics, ComponentLink3URL=https://datasheet.ciiva.com/16740/pyu-rc0402-51-rohs-l-6-r-16740602.pdf?src-supplier=Future+Electronics, ComponentLink4Description=https://datasheet.ciiva.com/8891/pyu-rc0402-51-rohs-l-6-8891339.pdf?src-supplier=Avnet, ComponentLink4URL=https://datasheet.ciiva.com/8891/pyu-rc0402-51-rohs-l-6-8891339.pdf?src-supplier=Avnet, ComponentLink5Description=https://datasheet.ciiva.com/5557/pyu-rc0402-51-rohs-l-6-r-5557997.pdf?src-supplier=Mouser, ComponentLink5URL=https://datasheet.ciiva.com/5557/pyu-rc0402-51-rohs-l-6-r-5557997.pdf?src-supplier=Mouser, ComponentLink6Description=https://datasheet.ciiva.com/7983/1018594-7983533.pdf?src-supplier=Element14, ComponentLink6URL=https://datasheet.ciiva.com/7983/1018594-7983533.pdf?src-supplier=Element14, Composition="Thick Film", Contact Plating=Tin,Matte,Lead, Depth=0.5mm, Lead Free="Lead Free", Length=1mm, Manufacturer Part Number 1=RC0402FR-1310KL, Military Standard=Not, Number of Pins=2, Number of Terminations=2, Packaging="Tape and Reel", Pricing 1="1=0.10000, 25=0.01200, 100=0.00400, 250=0.00400, 500=0.00300, 1000=0.00300 (USD)", Radiation Hardening=No, REACH SVHC="No SVHC", RoHS=Yes, Stock 1=62239, Supplier 1=Newark, Supplier 2="Future Electronics", Supplier 3=Mouser, Supplier 4=Element14, Supplier Part Number 2=RC0402FR-1310KL-CUTT, Supplier Part Number 3=603-RC0402FR-1310KL, Supplier Part Number 4=1799235, Termination=SMD/SMT, Voltage Rating (DC)=50V, Working Voltage=50V
R6 R7: library part RC0402FR-075K11L, "RES SMD 5.11K OHM 1% 1/16W 0402 5.11 kOhms ±1% 0.063W, 1/16W Chip Resistor 0402 (1005 Metric) Moisture Resistant Thick Film", Case Code (Imperial)=0402, Case Code (Metric)=1005, Manufacturer 1=Yageo, Max Operating Temperature=155°C, Max Power Dissipation=63mW, Min Operating Temperature=-55°C, Package Quantity=1, Power Rating=62.5mW, Resistance=5.11kR, Supplier Part Number 1=311-5.11KLRCT-ND, Temperature Coefficient=100ppm/°C, Tolerance=1%, Voltage Rating=50V, Case/Package=0402, ComponentLink1Description=https://datasheet.ciiva.com/2518/pyu-r-int-thick-7-2518982.pdf?src-supplier=Digi-Key, ComponentLink1URL=https://datasheet.ciiva.com/2518/pyu-r-int-thick-7-2518982.pdf?src-supplier=Digi-Key, ComponentLink2Description=https://datasheet.ciiva.com/2518/pyu-r-int-thick-7-2518983.pdf?src-supplier=Digi-Key, ComponentLink2URL=https://datasheet.ciiva.com/2518/pyu-r-int-thick-7-2518983.pdf?src-supplier=Digi-Key, ComponentLink3Description=https://datasheet.ciiva.com/5684/1018594-5684622.pdf?src-supplier=Farnell, ComponentLink3URL=https://datasheet.ciiva.com/5684/1018594-5684622.pdf?src-supplier=Farnell, ComponentLink4Description=https://datasheet.ciiva.com/16743/pyu-rc0402-51-rohs-l-6-r-16743871.pdf?src-supplier=Future+Electronics, ComponentLink4URL=https://datasheet.ciiva.com/16743/pyu-rc0402-51-rohs-l-6-r-16743871.pdf?src-supplier=Future+Electronics, Composition="Thick Film", Depth=0.5mm, Features="Moisture Resistant", Height=0.016inch, Lead Free="Lead Free", Length=1mm, Manufacturer Part Number 1=RC0402FR-075K11L, Military Standard=Not, Number of Terminations=2, Packaging="Tape and Reel", Pricing 1="1=0.10000, 10=0.01600, 100=0.00670, 1000=0.00301, 2500=0.00261, 5000=0.00215 (USD)", RoHS=Yes, Stock 1=1263456, Supplier 1=Digi-Key, Termination=SMD/SMT, Voltage Rating (DC)=50V, Width=0.02inch, Working Voltage=50V
R8: library part CRCW04020000Z0ED, "RES SMD 0 OHM JUMPER 1/16W 0402", Case Code (Imperial)=0402, Case Code (Metric)=1005, Manufacturer 1=Vishay, Max Operating Temperature=155°C, Max Power Dissipation=63mW, Min Operating Temperature=-55°C, Package Quantity=1, Resistance=0mR, Supplier Part Number 1=541-0.0JCT-ND, Temperature Coefficient=100ppm/°C, Tolerance=5%, Voltage Rating=50V, Case/Package=0402, ComponentLink1Description=https://datasheet.ciiva.com/3255/dcrcwe3-3255944.pdf?src-supplier=Avnet, ComponentLink1URL=https://datasheet.ciiva.com/3255/dcrcwe3-3255944.pdf?src-supplier=Avnet, ComponentLink2Description=https://datasheet.ciiva.com/3255/dcrcwe3-3255945.pdf?src-supplier=Avnet, ComponentLink2URL=https://datasheet.ciiva.com/3255/dcrcwe3-3255945.pdf?src-supplier=Avnet, ComponentLink3Description=https://datasheet.ciiva.com/16881/dcrcwe3-16881413.pdf?src-supplier=Avnet+Europe, ComponentLink3URL=https://datasheet.ciiva.com/16881/dcrcwe3-16881413.pdf?src-supplier=Avnet+Europe, ComponentLink4Description=https://datasheet.ciiva.com/2461/dcrcwe3-2461962.pdf?src-supplier=Digi-Key, ComponentLink4URL=https://datasheet.ciiva.com/2461/dcrcwe3-2461962.pdf?src-supplier=Digi-Key, ComponentLink5Description=https://datasheet.ciiva.com/7841/1720486-7841802.pdf?src-supplier=Element14, ComponentLink5URL=https://datasheet.ciiva.com/7841/1720486-7841802.pdf?src-supplier=Element14, ComponentLink6Description=https://datasheet.ciiva.com/2461/dcrcwe3-2461963.pdf?src-supplier=Digi-Key, ComponentLink6URL=https://datasheet.ciiva.com/2461/dcrcwe3-2461963.pdf?src-supplier=Digi-Key, ComponentLink7Description=https://datasheet.ciiva.com/2461/dcrcwe3-2461964.pdf?src-supplier=Digi-Key, ComponentLink7URL=https://datasheet.ciiva.com/2461/dcrcwe3-2461964.pdf?src-supplier=Digi-Key, ComponentLink8Description=https://datasheet.ciiva.com/7841/1697337-7841468.pdf?src-supplier=Element14, ComponentLink8URL=https://datasheet.ciiva.com/7841/1697337-7841468.pdf?src-supplier=Element14, ComponentLink9Description=https://datasheet.ciiva.com/16761/70200976-16761309.pdf?src-supplier=Allied+Electronics, ComponentLink9URL=https://datasheet.ciiva.com/16761/70200976-16761309.pdf?src-supplier=Allied+Electronics, ComponentLink10Description=https://datasheet.ciiva.com/26311/fld-crcw-e3-data-en-26311550.pdf?src-supplier=Distrelec, ComponentLink10URL=https://datasheet.ciiva.com/26311/fld-crcw-e3-data-en-26311550.pdf?src-supplier=Distrelec, Composition="Thick Film", Contact Plating=Tin, Depth=0.5mm, Features="Automotive AEC-Q200", Height=0.35mm, Lead Free="Lead Free", Length=1mm, Manufacturer Part Number 1=CRCW04020000Z0ED, Military Standard=Not, Mount="Surface Mount", Number of Terminations=2, Packaging="Tape and Reel", Power Rating=63mW, Pricing 1="1=0.10000, 10=0.03400, 25=0.02440, 50=0.01860, 100=0.01380, 250=0.01048, 500=0.00840, 1000=0.00618, 5000=0.00443 (USD)", Radiation Hardening=No, REACH SVHC=Unknown, RoHS=Yes, Stock 1=855968, Supplier 1=Digi-Key, Termination=SMD/SMT, Voltage Rating (DC)=50V, Weight=2.3E-05oz, Width=0.5mm

## Via types
v1: diameter 0.406, hole 0.203, Layer 1 to Layer 2, tented both sides, 34 vias

## Nets (pads, with @x,y where several pads share a name; then routed paths per layer and width w, separated by ;. In a path a pad name is that pad's centre, name@x,y a point inside that pad or via, vN(x,y) a via of type N, cw(c..) or ccw(c..) an arc to the next point about the centre after c; other vN are vias at no path point)
AUX_GPIO_3V3: B1.1 J2.1 | length 14
  Layer 1 w0.102: B1.1 v1(-5.925,-4.45)
  Layer 2 w0.102: v1(-5.925,-4.45) -4.637,-3.163 -4.637,1.238 -2.925,2.95 -0.35,2.95 0.9,1.7 J2.1
FSYNC_IN_ISO: J2.2
GND: B2.1 C1.1 D1.1 J1.A1 J1.A12 J1.B1 J1.B12 J1.SH1 J1.SH2 J1.SH3 J1.SH4 J2.8 J2.9 J2.10 J2.11 J2.12 Q2.2 R6.1 R7.1 R8.1 | length 13.9
  Layer 1 w0.102: v1(-6.9,-12) D1.1 ; v1(-3.825,-10.25) -3.4,-10.25 J1.B12 ; v1(-3.5,-8.225) -3.418,-8.225 -3.292,-8.351 -3.099,-8.351 -3,-8.45 J1.A1 ; v1(2.725,1.3) R8.1 ; J1.A12 v1(3,-8.1) ; v1(3.02,-10.555) 3.1,-10.475 J1.B1 ; v1(5.875,-4.45) B2.1
  Layer 2 w0.102: v1(-3.35,-13.6) -3.15,-13.6 C1.1 -3.2,-14.325 v1(-3.325,-14.45) ; R6.1 -2.675,-9.275 -2.675,-9.289 v1(-2.676,-9.291) -2.341,-9.291 -1.99,-8.94 -1.01,-8.94 v1(-0.65,-9.3) ; v1(-0.915,-11.635) Q2.2 ; v1(0.925,-9.3) 1.075,-9.45 1.65,-9.45 v1(3,-8.1) ; R7.1 v1(2.75,-10.9)
  other v1: 0.025,-7.65
GND_ISO: J2.7 R8.2 | length 1.6
  Layer 1 w0.102: J2.7 3.375,0.35 R8.2
NetB1_2: B1.2 R5.1 | length 3
  Layer 1 w0.102: v1(-7.25,-11.25) -6.9,-10.9 B1.2
  Layer 2 w0.102: R5.1 -7.375,-11.125 v1(-7.25,-11.25)
NetB2_2: B2.2 Q2.1 R4.1 | length 8.4
  Layer 1 w0.102: v1(5.775,-10.45) 6.3,-10.45 B2.2
  Layer 2 w0.102: Q2.1 R4.1 0.45,-9.9 2.85,-9.9 3.4,-10.45 v1(5.775,-10.45)
NetD1_2: D1.2 R3.1 | length 1.3
  Layer 1 w0.102: D1.2 v1(-5.525,-13.25)
  Layer 2 w0.102: R3.1 -5.825,-12.95 v1(-5.525,-13.25)
NetQ1_3: Q1.3 Q2.3 R2.1 | length 3.4
  Layer 2 w0.102: R2.1 -2.55,-10.75 Q2.3 -2.135,-11.14 Q1.3
PCC1: J1.A5 R6.2 | length 2.5
  Layer 1 w0.102: v1(-1.025,-8.4) -1,-8.425 J1.A5
  Layer 2 w0.102: R6.2 -3.05,-8.75 -1.375,-8.75 v1(-1.025,-8.4)
PCC2: J1.B5 R7.2 | length 1.3
  Layer 1 w0.102: J1.B5 0.8,-10 v1(0.8,-10.525)
  Layer 2 w0.102: v1(0.8,-10.525) 1.425,-10.525 R7.2
STRB_ISO: J2.6
USB_D_N: J1.A7 J1.B7 J2.4 | length 14.4
  Layer 1 w0.15: J1.B7 -0.25,-9.4 J1.A7 0.1,-8.25 0.1,-8.238 v1(0.109,-8.229)
  Layer 2 w0.15: J2.4 -1.477,-1.2 -2.054,-0.623 -2.424,-0.623 -3.55,-1.748 -3.55,-2 -3.55,-2.15 -3.55,-2.588 ccw(c-3.348,-2.588) -3.348,-2.79 cw(c-3.348,-2.992) -3.146,-2.992 cw(c-3.348,-2.992) -3.348,-3.194 ccw(c-3.348,-3.396) -3.55,-3.396 -3.55,-3.875 -3.55,-6.175 -2.025,-7.7 -0.672,-7.7 -0.17,-8.202 0.082,-8.202 v1(0.109,-8.229)
USB_D_P: J1.A6 J1.B6 J2.3 | length 14.3
  Layer 1 w0.15: J1.A6 -0.05,-8.65 v1(-0.084,-8.684) ; J1.B6 0.25,-9.419 v1(0.377,-9.292)
  Layer 2 w0.15: J2.3 -1.85,0.088 -2.311,-0.373 -2.528,-0.373 -3.8,-1.645 -3.8,-6.279 -2.129,-7.95 -0.775,-7.95 -0.084,-8.641 v1(-0.084,-8.684) -0.084,-8.83 v1(0.377,-9.292)
VBUS_USB: J1.A4 J1.A9 J1.B4 J1.B9 Q1.4 R1.1 R2.2 R4.2 | length 13.6
  Layer 1 w0.2: J1.A4 -1.5,-9.25 -1.25,-9.5 J1.B9 -1.25,-10.775 -1.025,-11 0.025,-11 ; v1(0.775,-11.75) 0.025,-11 ; J1.A9 1.5,-9.325 1.25,-9.575 J1.B4 1.25,-10.775 1.025,-11 0.025,-11
  Layer 2 w0.102: R2.2 -2.525,-10.375 v1(-1.45,-9.3) ; R4.2 0.275,-11.25 v1(0.775,-11.75)
  Layer 2 w0.2: v1(0.775,-11.75) 0.775,-11.85 Q1.4 1.65,-12.725 R1.1
  other v1: 1.3,-11.725 1.825,-11.725
VBUSOUT: C1.2 J2.5 Q1.1 Q1.2 Q1.5 Q1.6 R1.2 R3.2 R5.2 | length 16.4
  Layer 2 w0.102: R5.2 -6.475,-10.625 -5.563,-11.537 ; R3.2 -5.563,-11.613 -5.563,-11.537 ; v1(-0.05,-13.325) -0.1,-13.375 Q1.2 ; v1(0,-14.3) -0.025,-14.325 Q1.1 Q1.2 ; v1(0.55,-14.3) 0.575,-14.325 Q1.6 ; v1(0.6,-13.35) 0.625,-13.375 Q1.5 Q1.6 ; v1(2.525,-13.75) 2.525,-14.15 R1.2@2.7,-14.325 ; v1(3.15,-13.725) 3.15,-14.075 R1.2 R1.2@2.7,-14.325 ; -5.563,-11.537 -4.375,-12.725 C1.2 -1.775,-13.375 Q1.2 ; Q1.6 R1.2@2.7,-14.325
pads on no net: J1.A2 J1.A3 J1.A8 J1.A10 J1.A11 J1.B2 J1.B3 J1.B8 J1.B10 J1.B11

## Polygon pours and split planes (outlines as drawn)
GND on Layer 2 "GND_L02_P023" (solid, remove dead copper, pour order 23): -9,8.5 9,8.5 9,-16 -9,-16 -9,-4.5
VBUSOUT on Layer 2 "NONET_L-01_P-001" (solid, remove dead copper, pour order 25): -3.3,-13.025 -2.85,-13.475 -1.875,-13.475 -1.55,-13.8 -1.55,-14.475 -1.15,-14.875 3.475,-14.875 3.475,-13.675 2.85,-13.05 -0.775,-13.05 -1.85,-11.975 -3.075,-11.975 -3.325,-12.225 -3.3,-12.25 -3.3,-12.775
VBUS_USB on Layer 2 "VBUS_USB_L02_P022" (solid, remove dead copper, pour order 22): -0.225,-11.4 -0.225,-11.875 0.775,-12.875 1.925,-12.875 2.175,-13.125 3.375,-13.125 3.375,-12.225 2.15,-11 0.2,-11
GND on Layer 1 "GND_L01_P024" (solid, remove dead copper, pour order 24): -9,8.5 9,8.5 9,-16 -9,-16 -9,-4.5
VBUSOUT on Layer 1 "VBUSOUT_L01_P021" (solid, remove dead copper, pour order 21): -3.075,-11.975 -3.325,-12.225 -3.325,-13.075 -3.3,-13.075 -2.875,-13.5 -1.925,-13.5 -1.55,-13.875 -1.55,-14.45 -1.275,-14.725 3.375,-14.725 3.387,-14.713 6.35,-11.725 6.35,-6.9 0.525,-1.075 -0.225,-1.075 -0.75,-1.6 -0.75,-2.35 4.775,-7.875 4.775,-9.85 1.55,-13.075 -0.75,-13.075 -1.85,-11.975
VBUS_USB on Layer 1 "VBUS_USB_L01_P020" (solid, remove dead copper, pour order 20): -1.425,-10.175 -1.425,-10.875 -0.175,-12.125 2.1,-12.125 2.375,-11.85 2.375,-11.175 1.375,-10.175

## Silkscreen, mask and mechanical layers (free items; w line width, h text height)
Top Overlay:
  drawing of 7 lines, arcs and shapes, not listed
  text "NG6013_R3M2E3" at -3,-3.538 h1.2
  text "RECOVER" at -3.768,-7.25 h1.5 r90
  text "RST" at 4.732,-7.25 h1.5 r90
  text "PWR" at -4.709,-13.381 h1.5 r90
Top Solder Mask:
  lines w1: -8.5,4.5 -8.5,-12 ccw(c-5,-12) -5,-15.5 5,-15.5 ccw(c5,-12) 8.5,-12 8.5,4.5 ccw(c5,4.5) 5,8 -5,8 ; -8.5,4.5 cw(c-5,4.5) -5,8
Bottom Solder Mask:
  lines w1: -8.5,4.5 -8.5,-12 ccw(c-5,-12) -5,-15.5 5,-15.5 ccw(c5,-12) 8.5,-12 8.5,4.5 ccw(c5,4.5) 5,8 -5,8 ; -8.5,4.5 cw(c-5,4.5) -5,8
Board:
  lines w0.2: -9,-12 ccw(c-5,-12) -5,-16 5,-16 ccw(c5,-12) 9,-12 9,4.5 ccw(c5,4.5) 5,8.5 ; -9,-12 -9,4.5 cw(c-5,4.5) -5,8.5 ; -5,8.5 5,8.5